# EAGLE board Sardwiino (EAGLE 6.4)
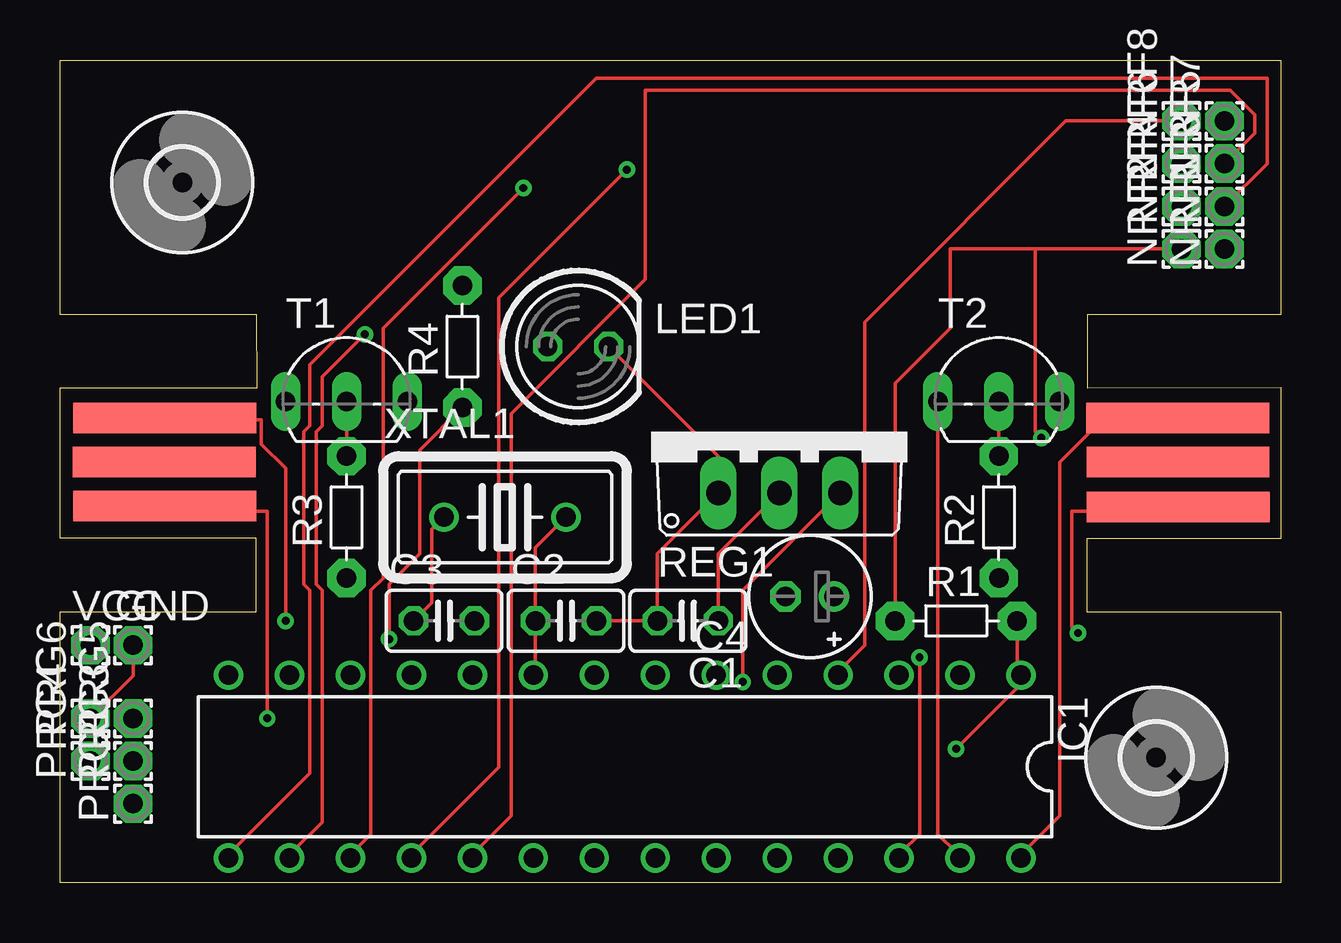
[diagram p0: board, top side]
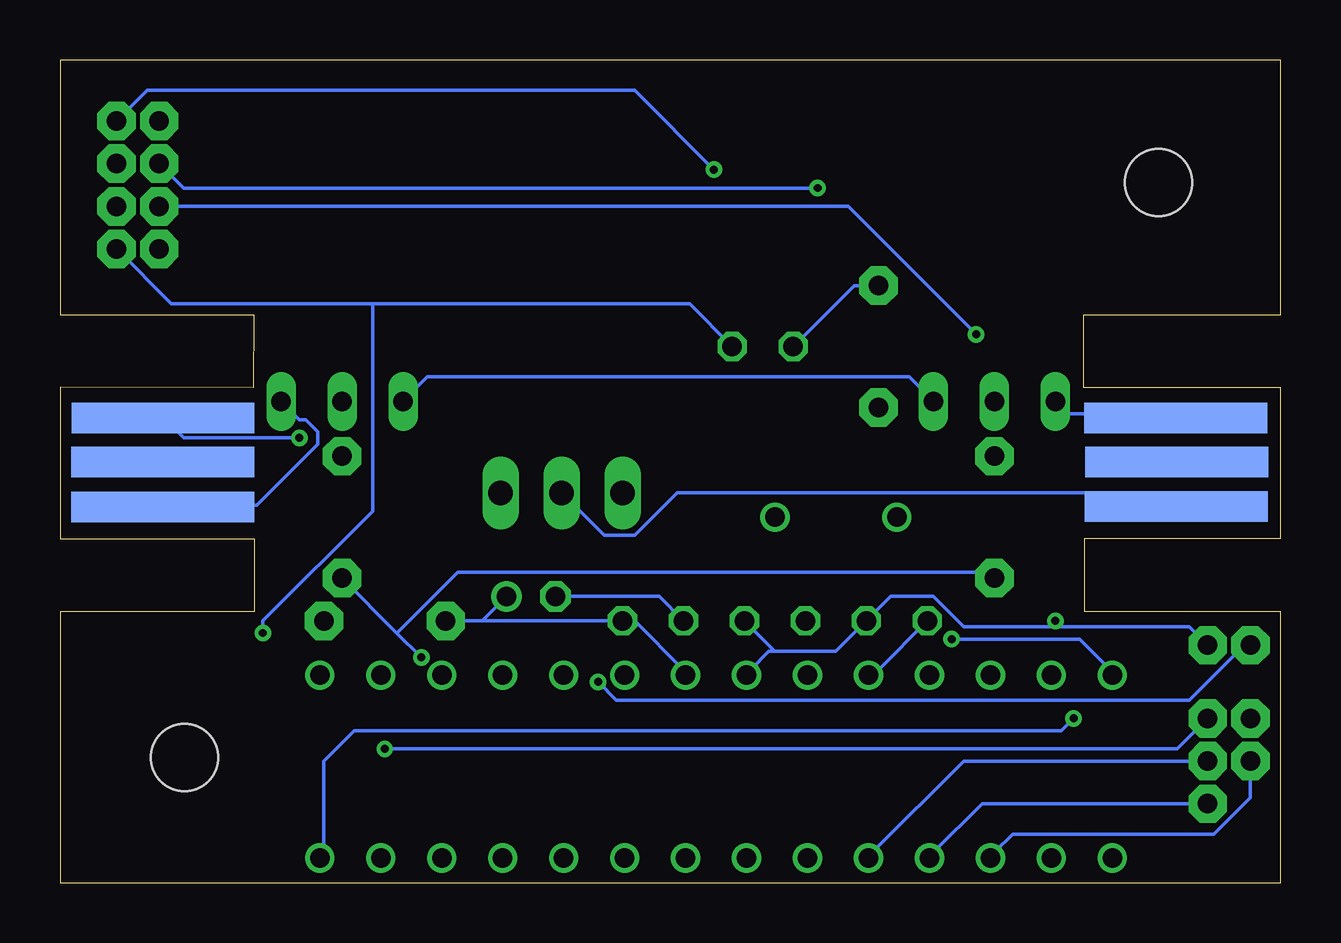
[diagram p1: board, bottom side, seen from below]

Size 50.87 x 34.29 mm. Coordinates in mm from the lower left corner, seen from the top.
Outline: 0,0 0,11.31 8.18,11.31 8.18,14.36 0.01,14.36 0.01,20.63 8.21,20.63 8.2,23.67 0,23.67 0,34.29 50.87,34.29 50.87,23.67 42.8,23.67 42.81,20.64 50.87,20.66 50.86,14.34 42.77,14.34 42.77,11.3 50.86,11.3 50.86,8.78 50.87,0 0,0
Copper layers (1*16): Top 0.0356mm / dielectric 1.5011mm / Bottom 0.0356mm
Design rules "LaenPCBOrder": minimum track width 6mil, minimum drill 13mil, track to track 6mil, track to pad 6mil, pad to pad 6mil, via to via 6mil, smd to smd 6mil, copper to edge 15mil, drill to drill 6mil, minimum pad ring 7mil, minimum via ring 7mil, stop-mask expansion 4mil, vias tented up to drill 0mil, thermal gap 10mil

## Footprints (pad centres in the part's own frame; a part is rotated, then mirrored left to right if it is on the bottom)
C025-025X050 = drill 0.813 octagon: 1 -1.27,0; 2 1.27,0
E2-5 = drill 0.813 pad 1.27: + -1.016,0 | drill 0.813 pad 1.27 octagon: - 1.016,0
WII-NUNCHUK-PAD = smd 7.62 x 1.27: P$1 0.279,0.127
2,8 = hole 2.8: 0,0
1,6/0,8 = drill 0.813 pad 1.6 octagon: 1 0,0
PDIP-T28 = drill 0.813 pad 1.2: 1 -16.51,-3.81; 2 -13.97,-3.81; 3 -11.43,-3.81; 4 -8.89,-3.81; 5 -6.35,-3.81; 6 -3.81,-3.81; 7 -1.27,-3.81; 8 1.27,-3.81; 9 3.81,-3.81; 10 6.35,-3.81; 11 8.89,-3.81; 12 11.43,-3.81; 13 13.97,-3.81; 14 16.51,-3.81; 15 16.51,3.81; 16 13.97,3.81; 17 11.43,3.81; 18 8.89,3.81; 19 6.35,3.81; 20 3.81,3.81; 21 1.27,3.81; 22 -1.27,3.81; 23 -3.81,3.81; 24 -6.35,3.81; 25 -8.89,3.81; 26 -11.43,3.81; 27 -13.97,3.81; 28 -16.51,3.81
LED5MM = drill 0.813 octagon: A -1.27,0; K 1.27,0
R-5 = drill 0.813 pad 1.6 octagon: 1 -2.54,0; 2 2.54,0
TO220V = drill 1.016 long: 1 -2.54,-2.54; 2 0,-2.54; 3 2.54,-2.54
TO92-EBC = drill 0.813 long: B 0,-1.27; C -2.54,-1.27; E 2.54,-1.27
HC18U-V = drill 0.813: 1 -2.54,0; 2 2.54,0

## Placement (x,y rotation side)
C1  [C025-025X050]  26.16,10.92 180 top
C2  [C025-025X050]  21.08,10.92 0 top
C3  [C025-025X050]  16,10.92 0 top
C4  [E2-5]  31.24,11.94 180 top
E$1  [WII-NUNCHUK-PAD]  4.07,17.42 0 top
E$2  [2,8]  5.1,29.18 0 top
E$3  [WII-NUNCHUK-PAD]  4.62,17.41 0 bottom
E$4  [WII-NUNCHUK-PAD]  4.64,15.56 0 bottom
E$5  [WII-NUNCHUK-PAD]  4.08,15.57 0 top
E$6  [WII-NUNCHUK-PAD]  4.08,19.25 0 top
E$7  [WII-NUNCHUK-PAD]  4.65,19.24 0 bottom
E$8  [WII-NUNCHUK-PAD]  46.3,17.42 0 top
E$9  [WII-NUNCHUK-PAD]  46.3,19.25 0 top
E$10  [WII-NUNCHUK-PAD]  46.31,15.54 0 top
E$11  [WII-NUNCHUK-PAD]  46.88,15.54 0 bottom
E$12  [WII-NUNCHUK-PAD]  46.86,17.42 0 bottom
E$13  [WII-NUNCHUK-PAD]  46.86,19.25 0 bottom
E$14  [2,8]  45.68,5.22 0 top
GND  [1,6/0,8]  3.05,9.91 0 top
IC1  [PDIP-T28]  23.53,4.85 180 top
LED1  [LED5MM]  21.59,22.35 0 top
NR7  [1,6/0,8]  48.51,31.75 90 top
NRF1  [1,6/0,8]  48.51,26.42 90 top
NRF2  [1,6/0,8]  46.74,26.42 90 top
NRF3  [1,6/0,8]  48.51,28.19 90 top
NRF4  [1,6/0,8]  46.74,28.19 90 top
NRF5  [1,6/0,8]  48.51,29.97 90 top
NRF6  [1,6/0,8]  46.74,29.97 90 top
NRF8  [1,6/0,8]  46.74,31.75 90 top
PRG1  [1,6/0,8]  3.05,3.3 90 top
PRG3  [1,6/0,8]  3.05,5.08 90 top
PRG4  [1,6/0,8]  1.27,5.08 90 top
PRG5  [1,6/0,8]  3.05,6.86 90 top
PRG6  [1,6/0,8]  1.27,6.86 90 top
R1  [R-5]  37.34,10.92 0 top
R2  [R-5]  39.12,15.24 90 top
R3  [R-5]  11.94,15.24 90 top
R4  [R-5]  16.76,22.35 90 top
REG1  [TO220V]  29.97,18.8 0 top
T1  [TO92-EBC]  11.94,21.34 0 top
T2  [TO92-EBC]  39.12,21.34 0 top
VCC  [1,6/0,8]  1.27,9.91 0 top
XTAL1  [HC18U-V]  18.54,15.24 0 top

## Library data of the parts
C1-C3 = resistor
C4 = rcl
E$1 E$3-E$13 = WiiChuk
E$2 E$14 = holes
GND NR7 NRF1-NRF6 NRF8 PRG1 PRG3-PRG6 VCC = wirepad
IC1 = texas
LED1 = led
R1-R4 = discrete
REG1 = linear
T1 = transistor-npn
T2 = transistor-pnp
XTAL1 = crystal

## Nets
S$2: C1.2 C2.2 C3.2 C4.- E$6.P$1 E$10.P$1 GND.1 IC1.8 LED1.K NRF1.1 PRG6.1 REG1.1
S$3: REG1.3 VCC.1
S$4: IC1.26 R2.1 R3.1
S$5: C1.1 C4.+ E$4.P$1 E$13.P$1 IC1.7 NRF2.1 R1.1 REG1.2
S$6: C2.1 IC1.9 XTAL1.2
S$7: C3.1 IC1.10 XTAL1.1
S$8: IC1.1 PRG5.1 R1.2
S$9: R3.2 T1.B
S$10: R2.2 T2.B
S$11: IC1.18 NR7.1 PRG1.1
S$12: IC1.19 NRF5.1 PRG3.1
S$13: IC1.17 NRF6.1 PRG4.1
S$14: IC1.15 NRF3.1
S$15: IC1.16 NRF4.1
S$16: IC1.4 NRF8.1
S$17: E$5.P$1 E$9.P$1 IC1.28
S$18: E$7.P$1 T1.C
S$19: IC1.27 T1.E T2.C
S$20: E$11.P$1 T2.E
S$21: IC1.14 R4.1
S$22: LED1.A R4.2

## Tracks (layer width: path | path; a pad name or v marks a point on that pad's centre or on a via)
S$2  (via drill 0.33)
  Top 0.152: LED1.K 27.43,17.78 REG1.1 24.89,13.72 C1.2 C2.2 | v42.42,10.41 42.16,10.67 42.16,15.49 46.48,15.49 E$10.P$1 | PRG6.1 3.05,8.64 GND.1 | v9.4,10.92 9.4,17.27 8.38,18.29 8.38,19.3 4.57,19.3 E$6.P$1
  Bottom 0.152: NRF1.1 46.23,24.13 37.85,24.13 | 37.85,24.13 24.64,24.13 LED1.K | v42.42,10.41 42.42,10.92 37.85,15.49 37.85,24.13 | 21.08,9.65 21.34,9.65 22.1,8.89 IC1.8 | 21.08,9.65 18.54,9.65 C3.2 16.26,11.94 14.48,11.94 13.21,10.67 9.4,10.67 | 21.08,9.65 C2.2 | C4.- 25.91,11.94 C1.2 | GND.1 3.81,10.67 9.4,10.67 | 9.4,10.67 v9.4,10.92
S$3  (via drill 0.33)
  Top 0.152: REG1.3 28.45,12.19 v28.45,8.38
  Bottom 0.152: v28.45,8.38 27.69,7.62 3.81,7.62 1.52,9.91 VCC.1
S$4  (via drill 0.33)
  Top 0.152: v35.81,9.4 35.81,2.03 35.05,1.27 IC1.26
  Bottom 0.152: R2.1 36.83,10.41 | 36.83,10.41 v35.81,9.4 | R3.1 12.19,12.95 34.29,12.95 36.83,10.41
S$5  (via drill 0.33)
  Top 0.152: REG1.2 27.43,13.72 C1.1 | 40.64,26.42 37.08,26.42 37.08,23.11 34.8,20.83 R1.1 | 40.64,26.42 NRF2.1 | v40.89,18.54 40.64,18.8 40.64,26.42
  Bottom 0.152: IC1.7 24.89,8.89 26.92,10.92 C1.1 33.27,10.92 | 33.27,10.92 C4.+ | R1.1 33.27,10.92 | REG1.2 28.19,14.48 26.92,14.48 25.15,16.26 5.08,16.26 4.57,15.75 E$4.P$1 | v40.89,18.54 45.72,18.54 46.48,19.3 E$13.P$1
S$6
  Top 0.152: IC1.9 19.81,8.89 C2.1 19.81,13.97 XTAL1.2
S$7
  Top 0.152: XTAL1.1 15.49,14.73 15.49,11.68 C3.1
  Bottom 0.152: C3.1 16.76,8.89 17.02,8.89 IC1.10
S$8  (via drill 0.33)
  Top 0.152: R1.2 39.88,8.89 IC1.1 39.88,8.64 39.88,8.13 v37.34,5.59
  Bottom 0.152: PRG5.1 4.32,5.59 v37.34,5.59
S$9
  Top 0.152: R3.2 T1.B
S$10
  Top 0.152: R2.2 T2.B
S$11  (via drill 0.33)
  Top 0.152: v23.62,29.72 18.29,24.38 18.29,4.83 14.73,1.27 IC1.18
  Bottom 0.152: PRG1.1 12.45,3.3 14.48,1.27 IC1.18 | NR7.1 47.24,33.02 26.92,33.02 v23.62,29.72
S$12
  Top 0.152: NRF5.1 49.78,31.24 49.78,32 48.77,33.02 24.38,33.02 24.38,25.15 18.8,19.56 18.8,2.79 17.27,1.27 IC1.19
  Bottom 0.152: PRG3.1 13.21,5.08 17.02,1.27 IC1.19
S$13  (via drill 0.33)
  Top 0.152: v19.3,28.96 13.46,23.11 13.46,12.7 12.95,12.19 12.95,2.03 12.19,1.27 IC1.17
  Bottom 0.152: PRG4.1 1.27,3.56 2.79,2.03 11.18,2.03 11.94,1.27 IC1.17 | NRF6.1 45.72,28.96 v19.3,28.96
S$14
  Top 0.152: NRF3.1 50.29,29.97 50.29,33.53 22.35,33.53 10.41,21.59 10.41,19.05 10.16,18.8 10.16,12.45 10.41,12.19 10.41,4.57 7.11,1.27 IC1.15
S$15  (via drill 0.33)
  Top 0.152: v12.7,22.86 10.92,21.08 10.92,19.05 10.67,18.8 10.67,12.45 10.92,12.19 10.92,2.54 9.65,1.27 IC1.16
  Bottom 0.152: v12.7,22.86 18.03,28.19 NRF4.1
S$16
  Top 0.152: NRF8.1 41.91,31.75 33.53,23.37 33.53,9.91 32.51,8.89 IC1.4
S$17  (via drill 0.33)
  Top 0.152: IC1.28 40.13,1.27 41.66,2.79 41.66,17.53 43.43,19.3 46.48,19.3 E$9.P$1 | v8.64,6.86 8.64,15.49 4.57,15.49 E$5.P$1
  Bottom 0.152: v8.64,6.86 9.14,6.35 38.61,6.35 39.88,5.08 39.88,1.27 IC1.28
S$18
  Bottom 0.152: T1.C 8.89,19.56 4.57,19.56 E$7.P$1
S$19
  Top 0.152: T2.C 36.58,2.03 37.34,1.27 IC1.27
  Bottom 0.152: T1.E 15.49,21.08 35.56,21.08 T2.C
S$20
  Bottom 0.152: T2.E 40.89,19.3 40.64,19.3 40.13,18.8 40.13,18.29 42.67,15.75 46.48,15.75 E$11.P$1
S$21  (via drill 0.33)
  Top 0.152: v13.72,10.16 13.72,12.45 14.99,13.72 14.99,18.03 R4.1
  Bottom 0.152: v13.72,10.16 8.38,10.16 7.11,8.89 IC1.14
S$22
  Bottom 0.152: LED1.A 17.78,24.89 R4.2

## Text on the board
tNames: NRF24L01+ | NPN | PNP | 330 | 16MHz | 3V3 | 4.7K | 4.7K | 100uF | 22pF | 22pF | 0.1uF | 4.7K | VCC | GND | ICSP | ATmega328